# Altium PCB nRF52832_extend.PcbDoc
Units mm, origin at the board's own origin, x right, y up, seen from the top; angles counter-clockwise.
Board outline 35.05 x 24.26 mm, 2 copper layers (Top Layer, Bottom Layer); 23 components, 38 nets, 125 pads, 17 vias.
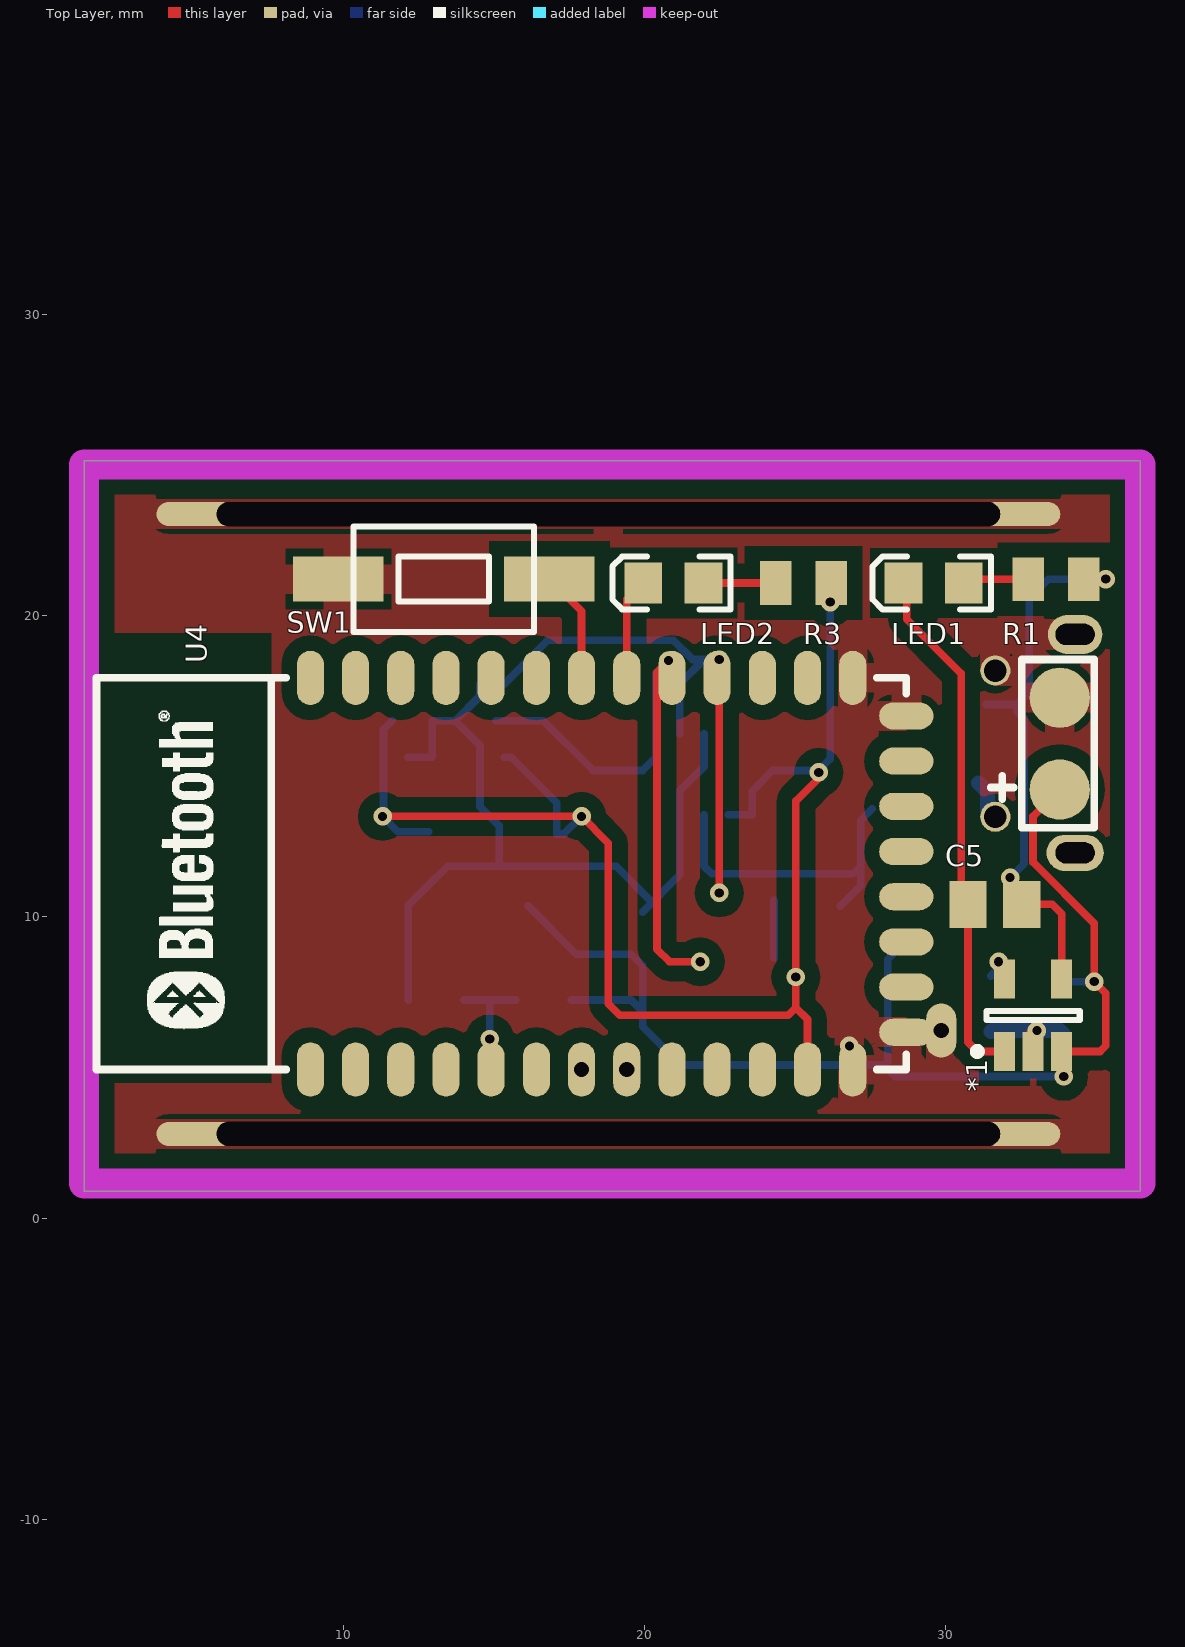
[diagram p0: Top Layer view]
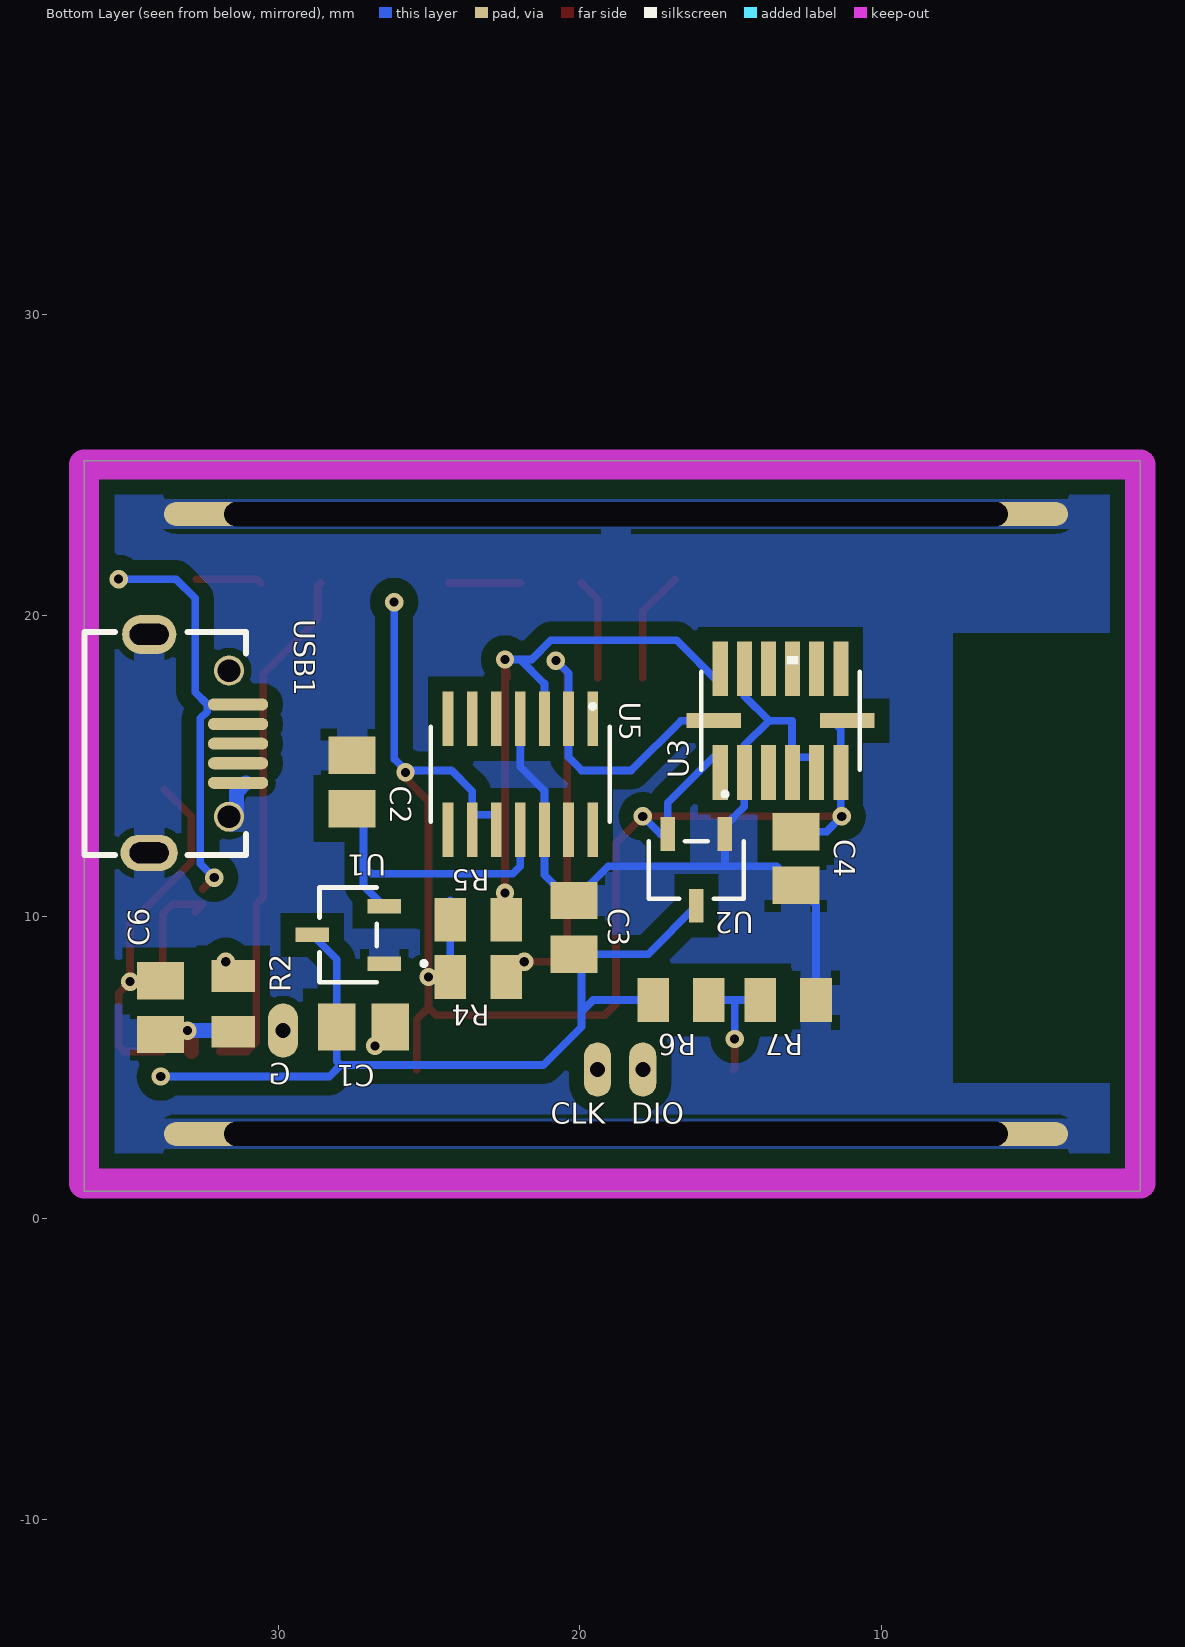
[diagram p1: Bottom Layer view, seen from below]
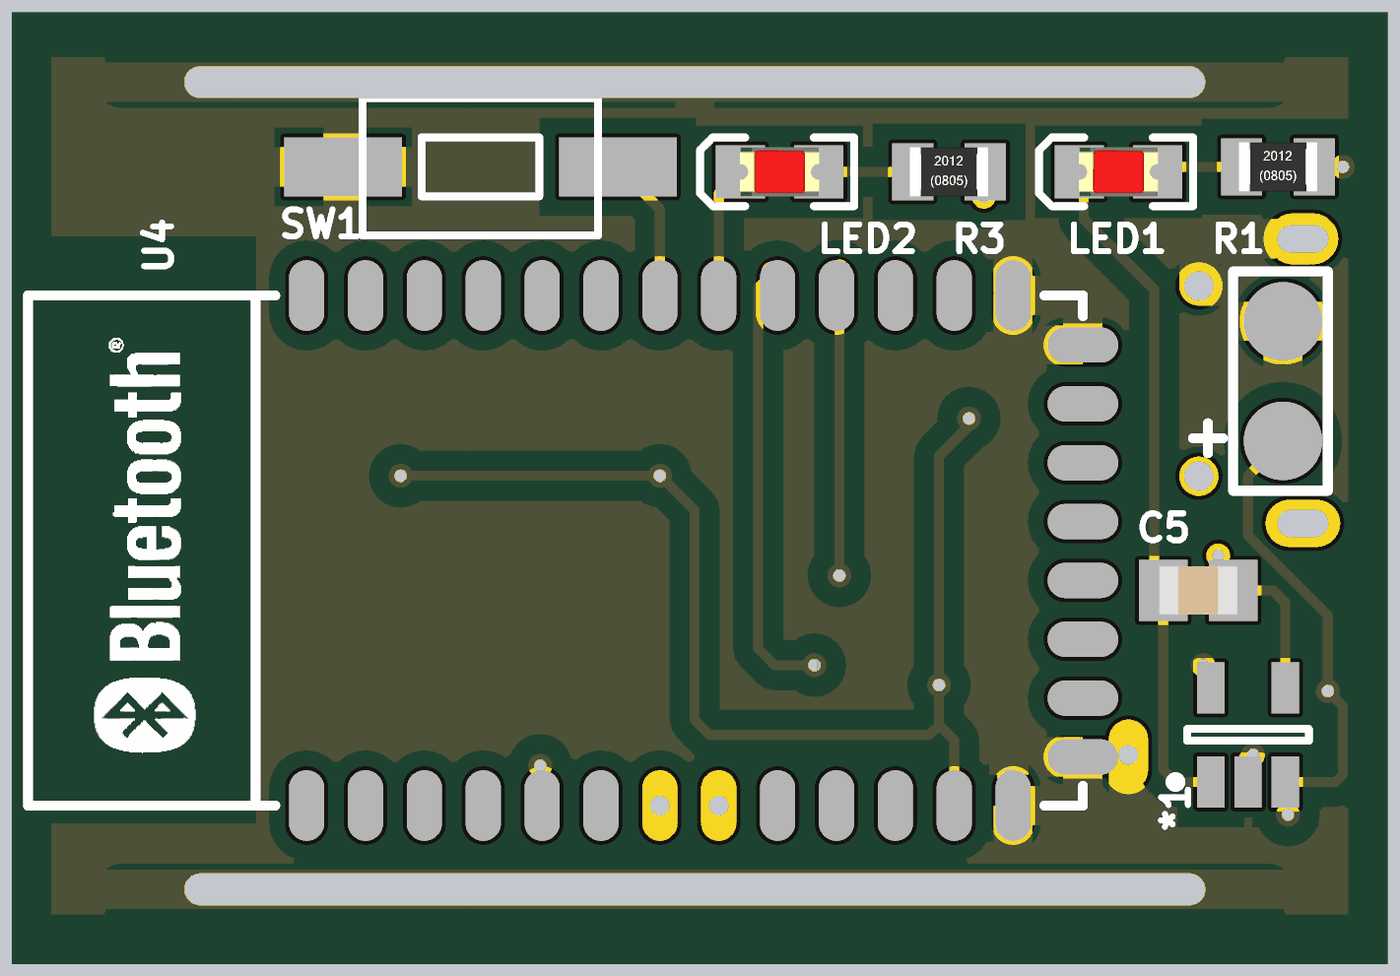
[diagram p2: 3D render of the assembled board from above, using the file's embedded part models]
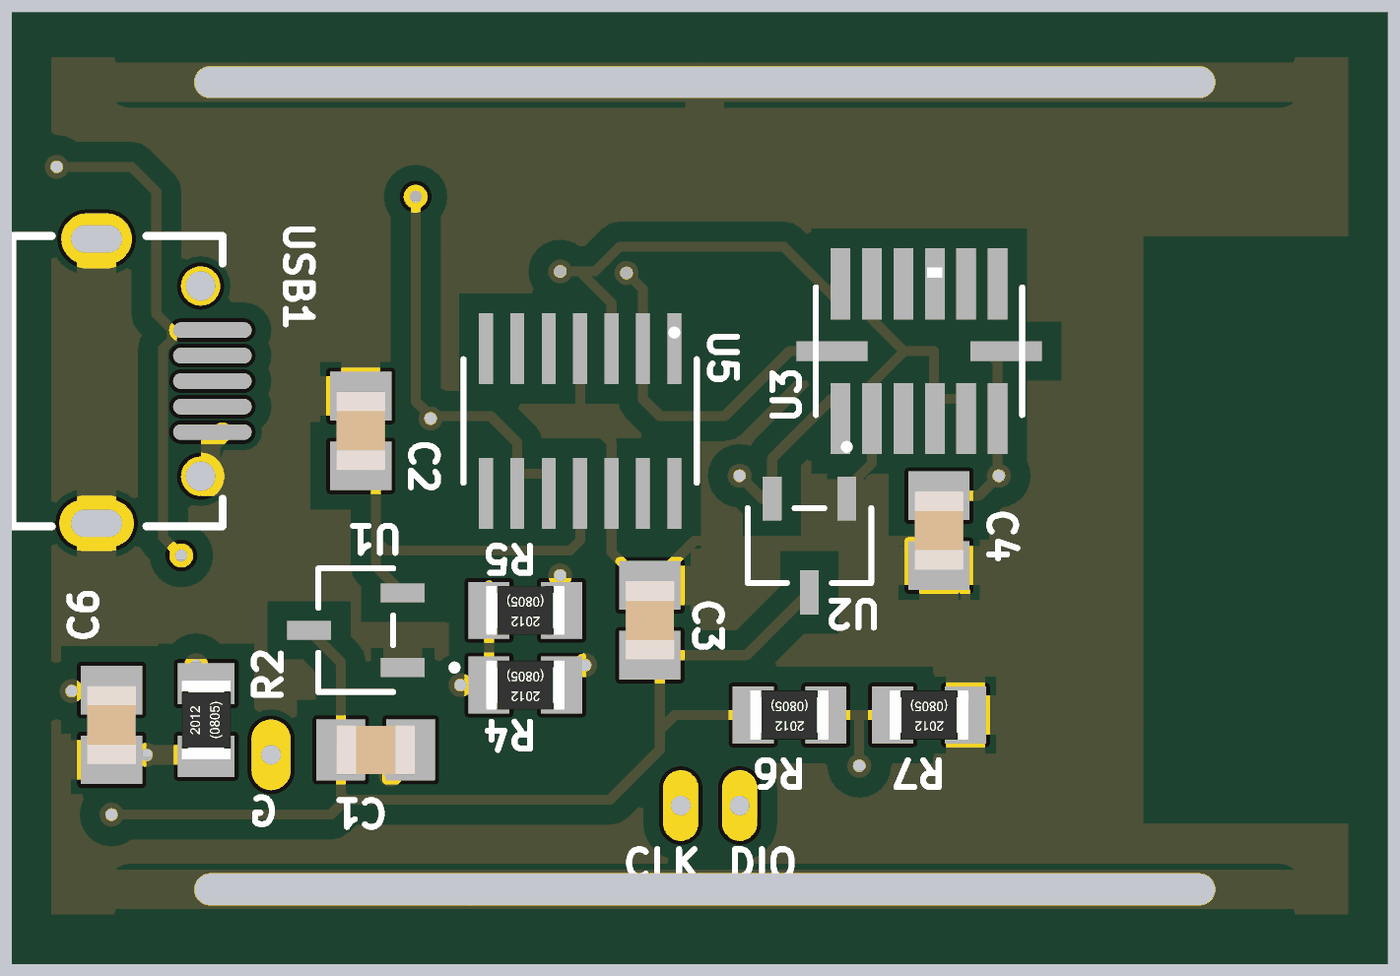
[diagram p3: 3D render of the assembled board from below, using the file's embedded part models]

## Layer stack, top to bottom
Top Solder: solder mask 0.0102, Solder Resist, Dk 3.5
Top Layer: signal copper 0.0356
Dielectric 1: dielectric 0.32, FR-4, Dk 4.8
Bottom Layer: signal copper 0.0356
Bottom Solder: solder mask 0.0102, Solder Resist, Dk 3.5

## Board outline
1.397,0.889 36.449,0.889 36.449,25.146 1.397,25.146

## Design rules (kind name [scope] priority, off if disabled: settings)
Clearance Clearance_1 [(InNet('GND') AND InPolygon)] p1: gap=0.5
Clearance [All] p2: gap=0.127
HoleSize [All] p1: absolutevalues=TRUE maxlimit=3 minlimit=0.025 maxpercent=80.000 minpercent=20.000
PolygonConnect [InNet('GND') vs InNet('GND')] p1: connectstyle=Relief reliefconductorwidth=1 reliefentries=4 polygonreliefangle="90 Angle" airgapwidth=0.254
RoutingVias [All] p1: holewidth=0.6 width=0.6 viastyle="Through Hole" minholewidth=0.127 minwidth=0.127 maxholewidth=3 maxwidth=5
SolderMaskExpansion [All] p1: expansion=0.102
Width [All] p1: maxlimit=1 minlimit=0.254 preferedwidth=0.5
29 further rules are at their usual default settings.

## Components (designator, comment, footprint, x,y, rotation, side; value= is the part's Value field where it differs from the comment)
*1 "MCP73832T-2ACI/OT" SOT-23-OT5_M 32.893,6.731 r90 top
C1 "Cap Semi" C0805 27.178,6.35 r0 bottom
C2 "Cap Semi" C0805 27.559,14.478 r270 bottom
C3 "Cap Semi" C0805 20.193,9.652 r270 bottom
C4 "Cap Semi" C0805 12.827,11.938 r90 bottom
C5 "Cap Semi" C0805 31.623,10.414 r0 top
C6 "Cap Semi" C0805 33.909,6.985 r90 bottom
LED1 "LED1" "0805 2.0X1.25X1.1" 29.591,21.082 r180 top
LED2 "LED1" "0805 2.0X1.25X1.1" 20.955,21.082 r180 top
R1 "Resistors SMD" R0805-M 33.655,21.209 r0 top
R2 "Resistors SMD" R0805-M 31.496,7.112 r90 bottom
R3 "Resistors SMD" R0805-M 25.273,21.082 r0 top
R4 "Resistors SMD" R0805-M 23.368,8.001 r0 bottom
R5 "Resistors SMD" R0805-M 23.368,9.906 r0 bottom
R6 "Resistors SMD" R0805-M 16.637,7.239 r0 bottom
R7 "Resistors SMD" R0805-M 13.081,7.239 r0 bottom
SW1 "SW-PB" SWITCH_SMD_6x3.5 13.335,21.209 r180 top
U1 "XC6206P121MR" SOT-23 27.686,9.398 r90 bottom
U2 "XC6206P121MR" SOT-23 16.129,11.557 r0 bottom
U3 "ADXL345BCCZ" LGA_CC-14-1 13.335,16.51 r90 bottom (schematic designator ADXL345)
U4 "nRF52832" BlueTooth_34_SMD 15.875,11.43 r90 top
U5 "MAX30102EFD+" 21-0880B 21.971,14.732 r270 bottom (schematic designator MAX30102)
USB1 "USB-MICRO" USB-MICRO 34.29,15.748 r270 bottom

## Footprints (in the part's own frame and the unit in brackets; to place one, negate y for a bottom-side part, rotate by r counter-clockwise, add the part's x,y. Pads: shape width x height; smd on the part's side, far side on the other; paste and mask are expansions set on the pad)
21-0880B [mil]
  rect 71.38x14 smd paste+0 mask+0: 1(-72.68,94.49) 2(-72.68,62.99) 3(-72.68,31.5) 4(-72.68,0) 5(-72.68,-31.5) 6(-72.68,-62.99) 7(-72.68,-94.49) 8(72.68,-94.49) 9(72.68,-62.99) 10(72.68,-31.5) 11(72.68,0) 12(72.68,31.5) 13(72.68,62.99) 14(72.68,94.49)
  silkscreen extent -92,-117 62,117, body extent 0,0 10,10, height 10
"0805 2.0X1.25X1.1" [mm] "Chip LED, Body 2.0x1.25mm"
  rect 1.25x1.35 smd: 1(-1,0) 2(1,0)
  Top Layer pour cut-out: -0.25,0.875 0.25,0.875 0.25,-0.875 -0.25,-0.875
  silkscreen extent -1.9,-0.87 2.02,0.87, body extent -1.01,-0.63 1.01,0.62, height 1.1
BlueTooth_34_SMD [mm]
  oval 1.8x0.9 smd: 1(-6.5,6.968) 2(-6.5,5.468) 3(-6.5,3.968) 4(-6.5,2.468) 5(-6.5,0.968) 6(-6.5,-0.532) 9(-6.5,-5.032) 10(-6.5,-6.532) 11(-6.5,-8.032) 12(-6.5,-9.532) 13(-6.5,-11.032) 22(6.5,-11.032) 23(6.5,-9.532) 24(6.5,-8.032) 25(6.5,-6.532) 26(6.5,-5.032) 27(6.5,-3.532) 28(6.5,-2.032) 29(6.5,-0.532) 30(6.5,0.968) 31(6.5,2.468) 32(6.5,3.968) 33(6.5,5.468) 34(6.5,6.968)
  oval 1.8x0.9 hole 0.5: 7(-6.5,-2.032) 8(-6.5,-3.532)
  oval 0.9x1.8 smd: 14(-5.262,-12.81) 15(-3.762,-12.81) 16(-2.262,-12.81) 17(-0.762,-12.81) 18(0.738,-12.81) 19(2.238,-12.81) 20(3.738,-12.81) 21(5.238,-12.81)
  silkscreen extent -6.5,-12.81 6.5,14.07
C0805 [mm] "Chip Capacitor, EIA 0805, IPC-7351 Level B Medium Density"
  round 0.254 on Mech15: 0(0,0)
  rect 1.24x1.56 smd: 1(-0.89,0) 2(0.89,0)
  Top Layer pour cut-out: -0.2,0.775 0.2,0.775 0.2,-0.775 -0.2,-0.775
  body extent -1,-0.62 1,0.63, height 0.58
LGA_CC-14-1 [mm]
  rect 1.813x0.5 smd paste+0 mask+0: 1(-1.718,2) 2(-1.718,1.2) 3(-1.718,0.4) 4(-1.718,-0.4) 5(-1.718,-1.2) 6(-1.718,-2) 8(1.718,-2) 9(1.718,-1.2) 10(1.718,-0.4) 11(1.718,0.4) 12(1.718,1.2) 13(1.718,2)
  rect 0.5x1.813 smd paste+0 mask+0: 7(0,-2.219) 14(0,2.219)
  silkscreen extent -1.63,-2.63 2.13,2.63, body extent 0,0 0.25,0.25, height 0.25
R0805-M [mm] "Chip Resistor, 2-Leads, Body 2.10x1.35mm, IPC Medium Density"
  rect 1.05x1.45 smd: 1(-0.925,0) 2(0.925,0)
  Top Layer pour cut-out: -0.381,0.925 0.381,0.925 0.381,-0.925 -0.381,-0.925
  body extent -1,-0.62 1,0.63, height 0.44
SOT-23 [mil]
  rect 19x44 smd paste+0 mask+0: 1(-37.4,-47) 2(37.4,-47) 3(0,47)
  silkscreen extent -62,-102 62,38, body extent 0,0 10,10, height 10
SOT-23-OT5_M [mm]
  rect 1.3x0.7 smd: 1(-1.2,0.95) 2(-1.2,0) 3(-1.2,-0.95) 4(1.2,-0.95) 5(1.2,0.95)
  silkscreen extent -1.32,-1.55 0.15,1.97, body extent -0.9,-1.55 0.9,1.55, height 1.45
SWITCH_SMD_6x3.5 [mm]
  rect 3x1.5 smd: 1(-3.5,0) 2(3.5,0)
  silkscreen extent -3,-1.75 3,1.75
USB-MICRO [mm] "USB方孔"
  oval 1.3x1.8 hole 0.7 slot 1.3 at 90 deg: 0(-3.625,0)
  round 1 hole 0.75: 0(-2.425,2.65) 0(2.425,2.65)
  oval 1.2x1.9 hole 0.7 slot 1.3 at 90 deg: 0(3.625,0)
  oval 0.4x2 smd: 1(-1.3,2.95) 2(-0.65,2.95) 3(0,2.95) 4(0.65,2.95) 5(1.3,2.95)
  silkscreen extent -3.7,-2.15 3.7,3.21

## Part data
C1 C2 C3 C4 C5 C6: "Capacitor (Semiconductor SIM Model)"
LED1 LED2: library part LED, "Typical INFRARED GaAs LED"
R1 R2 R3 R4 R5 R6 R7: "Resistor"
SW1: "按鈕開關"
U1 U2 U3 U5: "Imported"

## Free pads (board coordinates)
  round 2 smd: 0(33.782,17.272) 1(33.782,14.224)
  oval 30x0.8 hole 0.8 slot 26 at 0 deg: 4(18.796,2.794) 4(18.796,23.368)
  oval 1x1.8 hole 0.5: 8(29.845,6.223)

## Via types
v1: diameter 0.61, hole 0.305, Top Layer to Bottom Layer, tented both sides, 15 vias
v2: diameter 0.61, hole 0.305, Top Layer to Bottom Layer, 2 vias

## Nets (pads, with @x,y where several pads share a name; then routed paths per layer and width w, separated by ;. In a path a pad name is that pad's centre, name@x,y a point inside that pad or via, vN(x,y) a via of type N, cw(c..) or ccw(c..) an arc to the next point about the centre after c; other vN are vias at no path point)
1V8: C2.2 U1.2 U5.11 | length 10.8
  Bottom Layer w0.254: U5.11@21.971,13.386 U5.11 21.971,11.684 22.225,11.43 26.924,11.43 27.178,11.684 ; U1.2 27.178,11.034 27.178,11.684 ; C2.2 27.178,13.207 27.178,11.684
3V3: C4.2 R3.2 R4.2 R5.2 U2.2 U3.1 U3.6 U3.7 U4.12 U5.9 U5.10 | length 51.2
  Top Layer w0.254: v1(11.303,13.335) v1(17.907,13.335) 18.796,12.446 18.796,7.112 19.177,6.731 24.765,6.731 25.019,6.985 ; U4.12 25.407,6.597 25.019,6.985 ; v1(25.781,14.795) 25.781,14.605 25.019,13.843 v1(25.019,8.001) 25.019,6.985
  Bottom Layer w0.254: U3.7@11.617,16.51 11.335,16.228 11.335,15.291 11.335,13.303 11.81,12.828 C4.2 ; U3.1@15.335,15.291 15.57,15.291 17.079,13.782 U2.2 17.323,12.751 v1(17.907,13.335) ; U5.10@22.771,13.386 23.571,13.386 23.571,14.173 24.257,14.859 25.781,14.859 26.162,15.24 v2(26.162,20.447) ; R4.2@24.293,8.636 R5.2@24.293,10.541
GND: *1.2 C1.1 C2.1 C3.1 C4.1 C6.1 pad.0 pad.4 pad.8 R2.1 R7.1 SW1.2 U1.1 U2.1 U3.2 U3.4 U3.5 U3.12 U4.13 U4.14 U4.21 U4.22 U5.4 U5.12 USB1.0 USB1.5 | length 33.1
  Top Layer w0.5: *1.2 32.893,6.096 v1(33.02,6.223)
  Bottom Layer w0.254: U3.5@12.135,15.291 12.935,15.291 12.954,15.31 12.954,16.51 13.716,16.51 ; R7.1 12.156,10.377 C4.1 13.463,11.684 19.051,11.684 C3.1 ; U3.12@14.535,17.729 14.535,17.329 13.716,16.51 ; 15.179,11.745 U2.1 15.179,13.015 14.535,13.659 14.535,15.691 13.716,16.51 ; C3.1@19.939,10.161 21.171,11.393 21.171,14.186 21.971,14.986 U5.4@21.971,16.078
  Bottom Layer w0.5: USB1.5@31.086,14.448 31.386,14.148 USB1.0@31.386,13.323 ; R2.1 31.532,6.223 v1(33.02,6.223) 33.781,6.223 C6.1
  other v1: 26.797,5.715
Net*1_1: *1.1 C5.1 LED1.2 | length 17.5
  Top Layer w0.254: LED1.2 28.702,20.971 28.702,19.878 30.505,18.075 30.505,10.642 C5.1 30.733,5.843 31.045,5.531 *1.1
Net*1_5: *1.5 R2.2 | length 1.2
  Top Layer w0.254: v1(31.75,8.509) 31.943,8.316 *1.5
  Bottom Layer w0.254: R2.2 31.75,8.291 v1(31.75,8.509)
NetLED1_1: LED1.1 R1.1 | length 2.2
  Top Layer w0.254: LED1.1 30.718,21.209 R1.1
NetLED2_1: LED2.1 R3.1 | length 2.4
  Top Layer w0.254: LED2.1 R3.1
P0.02: U4.10
P0.03: U4.15
P0.04: U4.16
P0.05: U4.17
P0.06: U4.18
P0.07: U4.19
P0.08: U4.20
P0.09: U4.23
P0.10: U4.24
P0.13: LED2.2 U4.27 | length 3.4
  Top Layer w0.254: U4.27 19.407,20.534 LED2.2
P0.14: SW1.1 U4.28 | length 3.7
  Top Layer w0.254: SW1.1 17.907,20.137 U4.28
P0.15: U4.29
P0.16: U4.30
P0.17: U4.31
P0.18: U4.32
P0.19: U4.33
P0.20: U4.34
P0.21: U4.11
P0.25: U4.1
P0.26: U4.2
P0.27: U4.3
P0.28: U4.4
P0.29: R6.1 R7.2 U4.5 | length 4
  Top Layer w0.254: v1(14.859,5.944) 14.859,4.978 U4.5
  Bottom Layer w0.254: R7.2 14.859,7.239 ; v1(14.859,5.944) 14.859,7.239 ; R6.1 14.859,7.239
P0.30: U4.6
P0.31: U4.9
SCL: R4.1 U3.14 U4.26 U5.2 | length 20.9
  Top Layer w0.254: v1(20.79,18.504) 20.409,18.123 20.409,8.928 20.828,8.509 v1(21.844,8.509)
  Bottom Layer w0.254: U3.14@15.053,16.51 16.637,16.51 18.288,14.859 19.939,14.859 20.371,15.291 20.371,16.078 20.371,18.085 v1(20.79,18.504)
SDA: R5.1 U3.13 U4.25 U5.3 | length 20.3
  Top Layer w0.254: U4.25 v1(22.479,18.542) ; v1(22.479,10.795) v1(22.479,18.542) ; U4.25@22.479,17.89 v1(22.479,18.542)
  Bottom Layer w0.254: U3.13@15.335,17.729 16.783,19.177 20.955,19.177 21.59,18.542 v1(22.479,18.542) 21.971,18.542 21.171,17.742 U5.3@21.171,16.078
SW_DCLK: U4.8
SW_DIO: U4.7
V_USB: *1.4 C5.2 R1.2 USB1.1 | length 18.1
  Top Layer w0.254: v2(32.131,11.303) C5.2@32.512,10.923 ; C5.2@32.767,10.16 C5.2 33.528,10.414 33.843,10.099 *1.4
  Bottom Layer w0.254: USB1.1 32.355,17.048 ; v2(32.131,11.303) 32.594,11.766 32.594,16.586 32.367,16.813 32.367,17.048 32.355,17.048 ; v1(35.306,21.209) 33.401,21.209 32.766,20.574 32.766,17.459 32.355,17.048
VBAT: *1.3 C1.2 C3.2 C6.2 pad.1 R6.2 U1.3 U2.3 | length 41
  Top Layer w0.254: pad.1 32.893,13.335 32.893,11.811 34.925,9.779 v1(34.925,7.849) 35.306,7.468 35.306,5.715 35.122,5.531 *1.3
  Bottom Layer w0.254: U2.3 17.729,8.763 19.557,8.763 19.939,8.381 19.939,6.858 ; R6.2 19.558,7.239 19.939,6.858 ; 28.069,5.207 28.068,5.208 ; U1.3 28.068,8.586 C1.2 28.068,5.208 ; v1(33.909,4.699) 28.321,4.699 27.94,5.08 ; C6.2 33.935,7.849 v1(34.925,7.849) ; 19.939,6.858 19.939,6.35 21.209,5.08 27.94,5.08 ; 27.94,5.08 28.068,5.208
pads on no net: C1.0 C2.0 C3.0 C4.0 C5.0 C6.0 U3.3 U3.8 U3.9 U3.10 U3.11 U5.1 U5.5 U5.6 U5.7 U5.8 U5.13 U5.14 USB1.2 USB1.3 USB1.4

## Polygon pours and split planes (outlines as drawn)
GND on Top Layer "Bottom Layer-No Net" (solid, remove dead copper, pour order 0): -0.254,25.146 -0.254,1.143 39.116,1.143 39.116,25.146
GND on Bottom Layer "Bottom Layer-No Net" (solid, remove dead copper, pour order 2): 1.397,26.289 1.397,0.381 37.211,0.381 37.211,26.289

## Keep-outs
Keep-Out Layer:
  lines w1: 1.397,1.143 36.449,1.143 36.449,25.019 1.397,25.019 1.397,1.143

## Other copper
Top Layer:
  pour cut-out: 2.152,4.48 7.585,4.48 7.62,4.445 7.62,19.431 2.159,19.431
Bottom Layer:
  pour cut-out: 2.279,4.48 7.585,4.48 7.62,4.445 7.62,19.431 2.286,19.431

## Silkscreen, mask and mechanical layers (free items; w line width, h text height)
Top Overlay:
  lines w0.254: 31.492,14.293 32.254,14.293 ; 31.873,13.912 31.873,14.674 ; 32.512,12.954 34.925,12.954 34.925,18.542 32.512,18.542 32.512,12.954
Bottom Overlay:
  text "G" at 29.591,4.445 h0.69
  text "DIO" at 18.288,3.124 h0.69
  text "CLK" at 20.955,3.124 h0.69

## Text inside footprints (layer, text, board x,y; h text height)
U3: Mechanical 13 "*" at 15.1,15.381 h1.27 r270